# Altium PCB CCS_v3.2.PcbDoc
Units mil, origin at the board's own origin, x right, y up, seen from the top; angles counter-clockwise.
Board outline 2195 x 2996 mil, 2 copper layers (Top Layer, Bottom Layer); 37 components, 44 nets, 265 pads, 35 vias.
Unrouted connection lines stored in the file: 1.
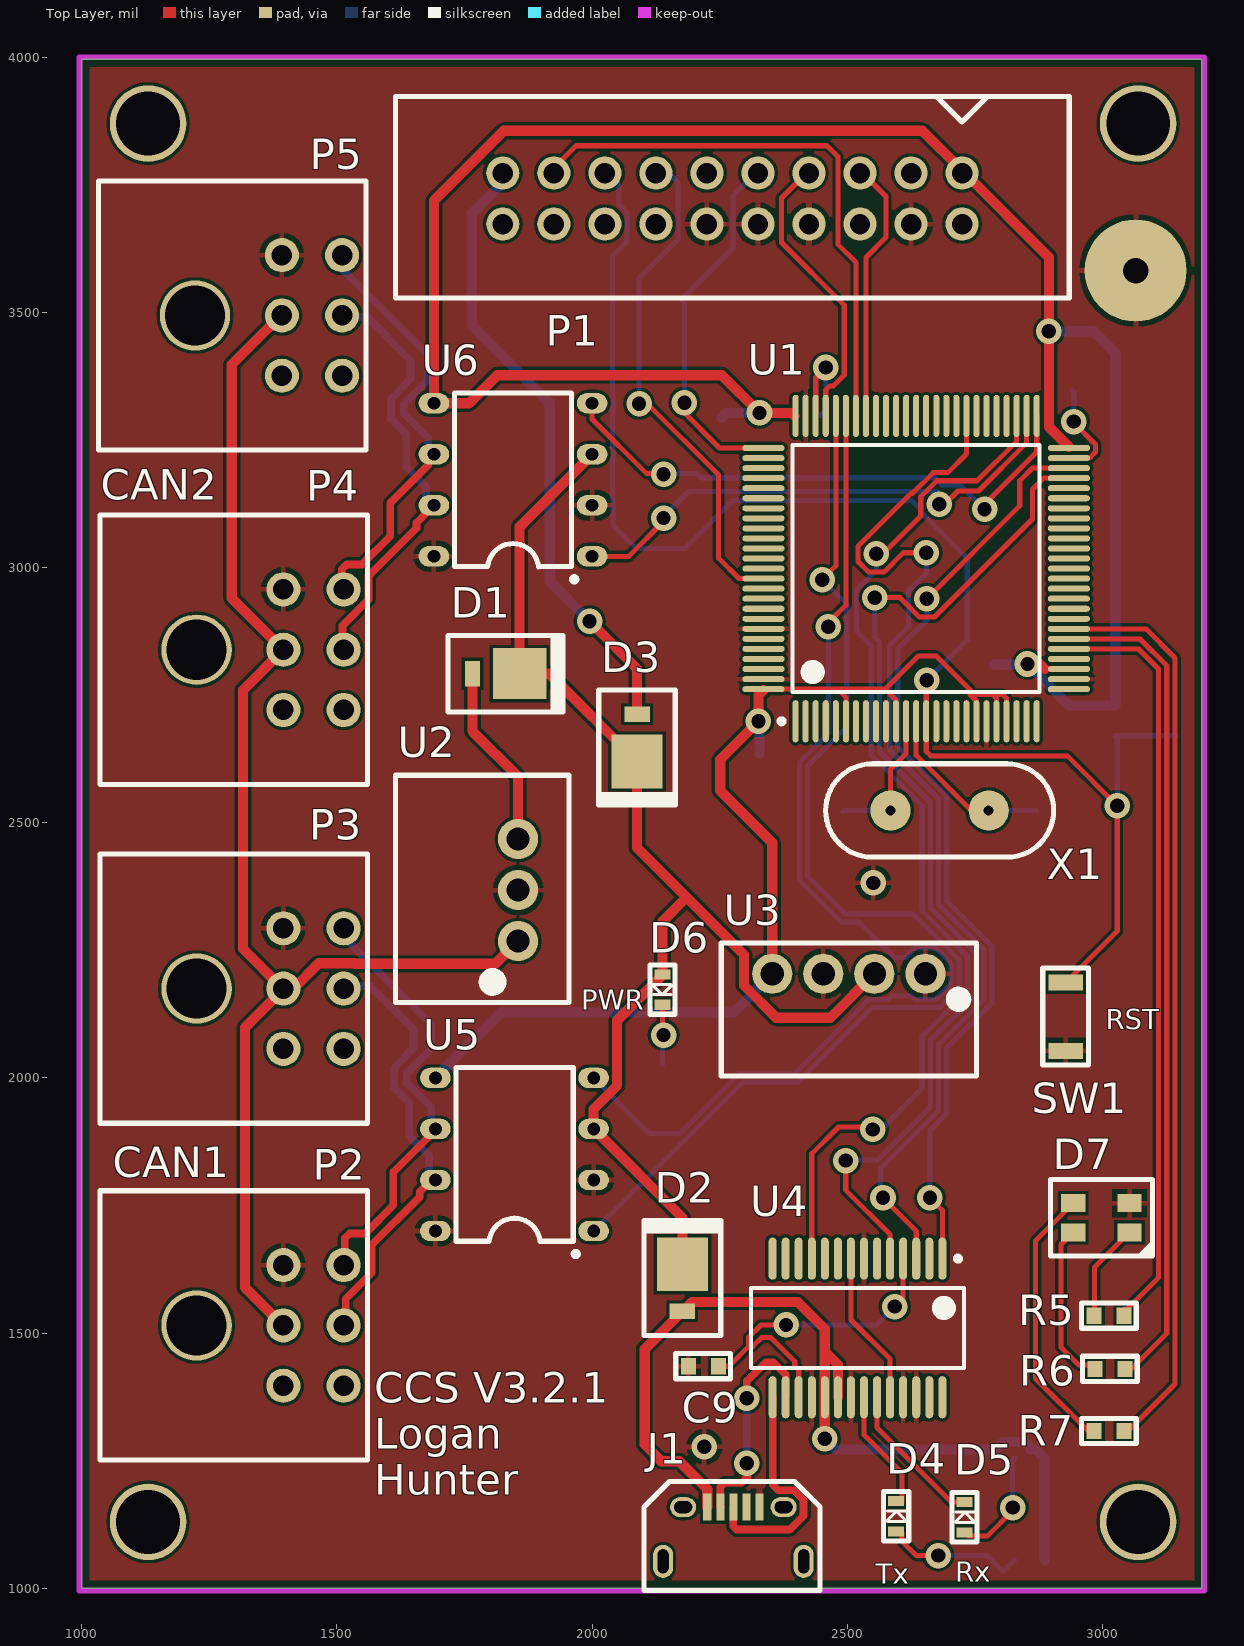
[diagram p0: Top Layer view]
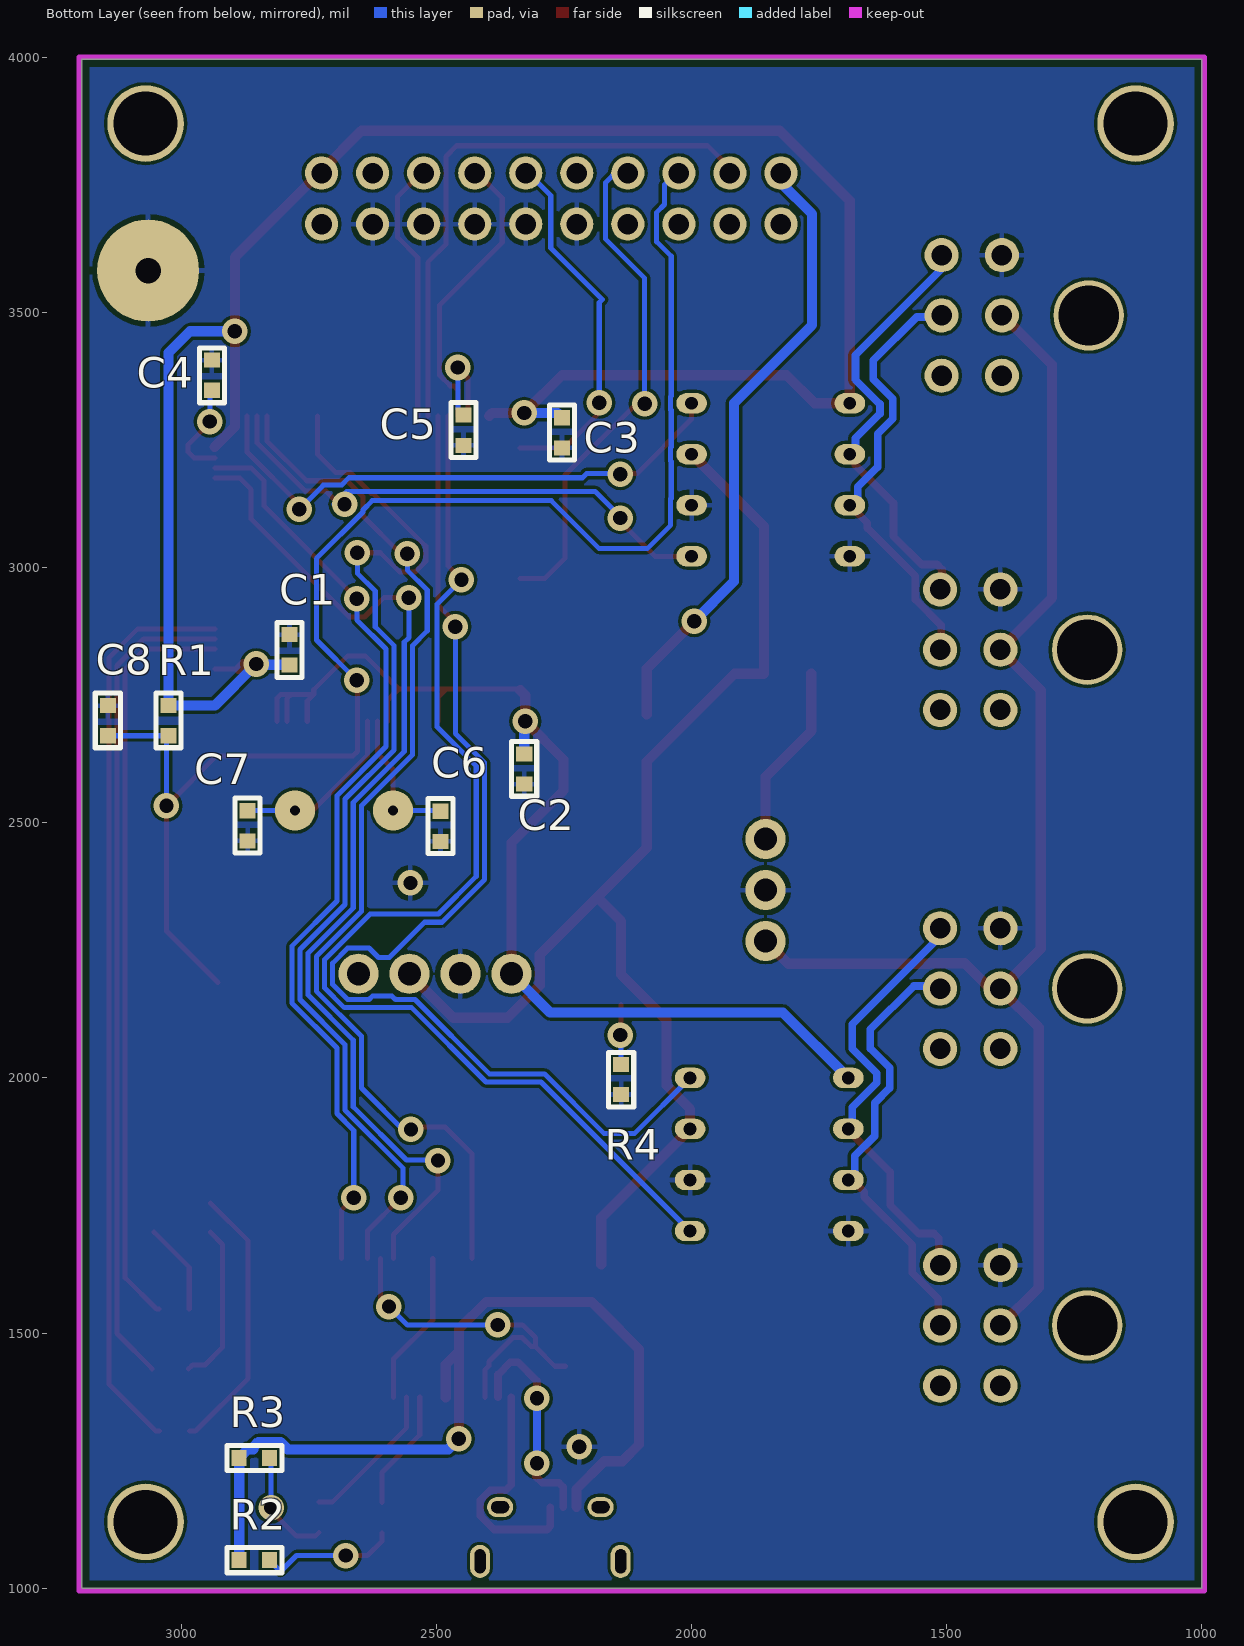
[diagram p1: Bottom Layer view, seen from below]

## Layer stack, top to bottom
Top Solder: solder mask 0.4, Solder Resist, Dk 3.5
Top Layer: signal copper 1.4
Dielectric 1: dielectric 12.6, FR-4, Dk 4.8
Bottom Layer: signal copper 1.4
Bottom Solder: solder mask 0.4, Solder Resist, Dk 3.5

## Board outline
1000,1000 3195,1000 3195,3996 1000,3996

## Design rules (kind name [scope] priority, off if disabled: settings)
BoardOutlineClearance [All] p1: gap=15
Clearance [All] p1: gap=6
DiffPairsRouting [All] p1: maxlimit=10 minlimit=10 mostfreqgap=10 toplayer_minwidth=15 toplayer_maxwidth=15 toplayer_prefwidth=15 bottomlayer_minwidth=15 bottomlayer_maxwidth=15 bottomlayer_prefwidth=15 maxuncoupledlength=500
HoleSize [All] p1: absolutevalues=TRUE maxlimit=100 minlimit=13 maxpercent=80.000 minpercent=20.000
MinimumAnnularRing [All] p1: minimumring=7
PolygonConnect [All] p1: connectstyle=Relief reliefconductorwidth=10 reliefentries=4 polygonreliefangle="90 Angle" airgapwidth=10
RoutingVias [All] p1: holewidth=28 width=50 viastyle="Through Hole" minholewidth=28 minwidth=50 maxholewidth=28 maxwidth=50
SolderMaskExpansion [All] p1: expansion=4
Width [All] p1: maxlimit=30 minlimit=6 preferedwidth=10
28 further rules are at their usual default settings.

## Classes and differential pairs
component class Conectors: J1 P1 P2 P3 P4 P5
component class Power: C1 C2 C3 D1 D2 D3 D6 R4 U2 U3
component class MCU: C4 C5 C6 C7 C8 D7 R1 R5 R6 R7 SW1 U1 X1
component class Communications: C9 D4 D5 R2 R3 U4 U5 U6
differential pair USBD: +USBD_P -USBD_N
differential pair CAN2: +CAN2_P -CAN2_N
differential pair CAN1: +CAN1_P -CAN1_N

## Components (designator, comment, footprint, x,y, rotation, side; value= is the part's Value field where it differs from the comment)
C1 "SCH_GENERIC_CAPACITOR_0603" PCB_GENERIC_SMD_0603 2788,2839 r270 bottom
C2 "SCH_GENERIC_CAPACITOR_0603" PCB_GENERIC_SMD_0603 2328,2605 r90 bottom
C3 "SCH_GENERIC_CAPACITOR_0603" PCB_GENERIC_SMD_0603 2254,3264 r90 bottom
C4 "SCH_GENERIC_CAPACITOR_0603" PCB_GENERIC_SMD_0603 2940,3377 r270 bottom
C5 "SCH_GENERIC_CAPACITOR_0603" PCB_GENERIC_SMD_0603 2447,3269 r90 bottom
C6 "SCH_GENERIC_CAPACITOR_0603" PCB_GENERIC_SMD_0603 2492,2493 r90 bottom
C7 "SCH_GENERIC_CAPACITOR_0603" PCB_GENERIC_SMD_0603 2870,2494 r90 bottom
C8 "SCH_GENERIC_CAPACITOR_0603" PCB_GENERIC_SMD_0603 3144,2700 r90 bottom
C9 "SCH_GENERIC_CAPACITOR_0603" PCB_GENERIC_SMD_0603 2218,1435 r180 top
D1 "Schottky Diode" "ON Semi Schottky Diode - MBRM110LT1G" 1793,2792 r180 top
D2 "Schottky Diode" "ON Semi Schottky Diode - MBRM110LT1G" 2177,1570 r270 top
D3 "Schottky Diode" "ON Semi Schottky Diode - MBRM110LT1G" 2088,2685 r90 top
D4 "Green LED" SMD_0603_LED 2594,1141 r90 top
D5 "Orange LED" SMD_0603_LED 2728,1139 r90 top
D6 "Red LED" SMD_0603_LED 2140,2173 r270 top
D7 "TriColourLED" "TricolourLED - SunLED - DK  1497-1225-2-ND" 2998,1726 r0 top
J1 "Amphenol MicroUSB" "Amphenol MicroUSB" 2276.82,1159 r0 top
P1 "SWD/VCOM Header" "Samtec TST-110-01-G-D" 1825,3773 r0 top
P2 "CAN1" PCB_MLX_MICROFIT_3X2 1225,1515 r270 top
P3 "CAN1 TERM" PCB_MLX_MICROFIT_3X2 1225,2175 r270 top
P4 "CAN2" PCB_MLX_MICROFIT_3X2 1225,2839 r270 top
P5 "CAN2 TERM" PCB_MLX_MICROFIT_3X2 1222,3494 r270 top
R1 "SCH_GENERIC_RESISTOR_0603" PCB_GENERIC_SMD_0603 3025,2700 r90 bottom
R2 "SCH_GENERIC_RESISTOR_0603" PCB_GENERIC_SMD_0603 2856.98,1055 r180 bottom
R3 "SCH_GENERIC_RESISTOR_0603" PCB_GENERIC_SMD_0603 2856.98,1255 r180 bottom
R4 "SCH_GENERIC_RESISTOR_0603" PCB_GENERIC_SMD_0603 2138,1997 r270 bottom
R5 "SCH_GENERIC_RESISTOR_0603" PCB_GENERIC_SMD_0603 3013,1534 r180 top
R6 "SCH_GENERIC_RESISTOR_0603" PCB_GENERIC_SMD_0603 3015,1430 r180 top
R7 "SCH_GENERIC_RESISTOR_0603" PCB_GENERIC_SMD_0603 3013,1308 r180 top
SW1 "Reset Switch" "Push Button Switch" 2928,2120 r270 top
U1 "STM32F407VGT6" STM-LQFP100_M 2635,2998 r90 top
U2 "R78E-1.0 DC/DC" R78-1.0 1855,2368 r90 top
U3 "RECOM RO Series" "RECOM RO Series 1W DCDC" 2653,2204 r180 top
U4 "IC_FT232RL" SSOP-28 2520,1510 r270 top
U5 "MCP2562" MCP2562 1848,1850 r180 top
U6 "MCP2562" MCP2562 1845,3172 r180 top
X1 "XTAL" CRYSTAL_8MHZ 2681,2524 r0 top

## Footprints (in the part's own frame and the unit in brackets; to place one, negate y for a bottom-side part, rotate by r counter-clockwise, add the part's x,y. Pads: shape width x height; smd on the part's side, far side on the other; paste and mask are expansions set on the pad)
"Amphenol MicroUSB" [mm] "10118194-0001LF"
  rect 0.4x1.35 smd: 1(-1.3,0) 2(-0.65,0) 3(0,0) 4(0.65,0) 5(1.3,0)
  oval 1x1.65 hole 0.55 slot 1.2 at 90 deg: ""(-3.5,-2.7) ""(3.5,-2.7)
  oval 1.3x1 hole 0.6 slot 0.9 at 0 deg: ""(-2.5,0) ""(2.5,0)
  silkscreen extent -4.44,-4.15 4.32,1.27, body extent -4.06,-5.21 4.06,0.51, height 2.4
CRYSTAL_8MHZ [mm] "631-1100-ND"
  round 2 hole 0.5: 1(-2.44,0) 2(2.44,0)
  silkscreen extent -5.68,-2.32 5.68,2.32, body extent -5.59,-1.85 5.59,1.85, height 3.6
MCP2562 [mil]
  oval 60x40 hole 25: 1(-155,150) 2(-155,50) 3(-155,-50) 4(-155,-150) 5(155,-150) 6(155,-50) 7(155,50) 8(155,150)
  silkscreen extent -125,-170 115,200, body extent -115,-170 115,170, height 210
"ON Semi Schottky Diode - MBRM110LT1G" [mil]
  rect 105x100 smd: 1(-65,0)
  rect 30x50 smd: 2(27.5,0)
  silkscreen extent -150,-75 75,75, body extent -115,-65 0,65, height 40
PCB_GENERIC_SMD_0603 [mm]
  rect 0.75x0.8 smd: 1(-0.75,0) 2(0.75,0)
  silkscreen extent -1.35,-0.63 1.38,0.63, body extent -0.75,-0.5 0.75,0.5, height 0.45
PCB_MLX_MICROFIT_3X2 [mm]
  round 1.7 hole 1.02: 1(3,4.32) 2(0,4.32) 3(-3,4.32) 4(3,7.32) 5(0,7.32) 6(-3,7.32)
  round 3.5 hole 3: ""(0,0)
  silkscreen extent -6.7,-4.8 6.7,8.5, body extent -6.57,-4.65 6.58,7.59, height 8.83
"Push Button Switch" [mm]
  rect 0.8x1.7 smd: 1(-1.7,0) 2(1.7,0)
  silkscreen extent -2.41,-1.14 2.41,1.14, body extent -2.16,-0.89 2.16,0.89, height 1.6
R78-1.0 [mm]
  round 2 hole 1.15: 1(-2.54,0) 2(0,0) 3(2.54,0)
  silkscreen extent -5.59,-2.54 5.71,6.1, body extent -4.44,-1.59 4.45,5.4, height 10.4
"RECOM RO Series 1W DCDC" [mm] "RO-053.3S"
  round 2 hole 1.15: 1(0,0) 2(2.54,0) 3(5.08,0) 4(7.62,0)
  silkscreen extent -2.54,-1.52 10.16,5.08, body extent -2.41,-1.4 10.03,4.95, height 10
"Samtec TST-110-01-G-D" [mil] "TST-110-01-G-D"
  round 65 hole 40: 1(900,0) 2(900,-100) 3(800,0) 4(800,-100) 5(700,0) 6(700,-100) 7(600,0) 8(600,-100) 9(500,0) 10(500,-100) 11(400,0) 12(400,-100) 13(300,0) 14(300,-100) 15(200,0) 16(200,-100) 17(100,0) 18(100,-100) 19(0,0) 20(0,-100)
  silkscreen extent -210,-245 1110,150, body extent -200,-233 1100,132, height 350
SMD_0603_LED [mm]
  rect 0.5x0.8 smd: 1(-0.747,-0.047) 2(0.753,-0.047)
  silkscreen extent -1.22,-0.67 1.23,0.58, body extent -0.75,-0.55 0.75,0.45, height 0.45
SSOP-28 [mm] "28-Pin SSOP 0.65 mm Pitch"
  oval 2.1x0.4 smd: 1(-3.45,4.225) 2(-3.45,3.575) 3(-3.45,2.925) 4(-3.45,2.275) 5(-3.45,1.625) 6(-3.45,0.975) 7(-3.45,0.325) 8(-3.45,-0.325) 9(-3.45,-0.975) 10(-3.45,-1.625) 11(-3.45,-2.275) 12(-3.45,-2.925) 13(-3.45,-3.575) 14(-3.45,-4.225) 15(3.45,-4.225) 16(3.45,-3.575) 17(3.45,-2.925) 18(3.45,-2.275) 19(3.45,-1.625) 20(3.45,-0.975) 21(3.45,-0.325) 22(3.45,0.325) 23(3.45,0.975) 24(3.45,1.625) 25(3.45,2.275) 26(3.45,2.925) 27(3.45,3.575) 28(3.45,4.225)
  silkscreen extent -3.57,-5.3 2,5.3, body extent -2.7,-5.3 2.7,5.3, height 2
STM-LQFP100_M [mm] "Thin QFP, 100-Leads, Body 14x14mm, Pitch 0.5mm, IPC Low Density"
  oval 2.1x0.3 smd: 1(-7.6,6) 2(-7.6,5.5) 3(-7.6,5) 4(-7.6,4.5) 5(-7.6,4) 6(-7.6,3.5) 7(-7.6,3) 8(-7.6,2.5) 9(-7.6,2) 10(-7.6,1.5) 11(-7.6,1) 12(-7.6,0.5) 13(-7.6,0) 14(-7.6,-0.5) 15(-7.6,-1) 16(-7.6,-1.5) 17(-7.6,-2) 18(-7.6,-2.5) 19(-7.6,-3) 20(-7.6,-3.5) 21(-7.6,-4) 22(-7.6,-4.5) 23(-7.6,-5) 24(-7.6,-5.5) 25(-7.6,-6) 51(7.6,-6) 52(7.6,-5.5) 53(7.6,-5) 54(7.6,-4.5) 55(7.6,-4) 56(7.6,-3.5) 57(7.6,-3) 58(7.6,-2.5) 59(7.6,-2) 60(7.6,-1.5) 61(7.6,-1) 62(7.6,-0.5) 63(7.6,0) 64(7.6,0.5) 65(7.6,1) 66(7.6,1.5) 67(7.6,2) 68(7.6,2.5) 69(7.6,3) 70(7.6,3.5) 71(7.6,4) 72(7.6,4.5) 73(7.6,5) 74(7.6,5.5) 75(7.6,6)
  oval 0.3x2.1 smd: 26(-6,-7.6) 27(-5.5,-7.6) 28(-5,-7.6) 29(-4.5,-7.6) 30(-4,-7.6) 31(-3.5,-7.6) 32(-3,-7.6) 33(-2.5,-7.6) 34(-2,-7.6) 35(-1.5,-7.6) 36(-1,-7.6) 37(-0.5,-7.6) 38(0,-7.6) 39(0.5,-7.6) 40(1,-7.6) 41(1.5,-7.6) 42(2,-7.6) 43(2.5,-7.6) 44(3,-7.6) 45(3.5,-7.6) 46(4,-7.6) 47(4.5,-7.6) 48(5,-7.6) 49(5.5,-7.6) 50(6,-7.6) 76(6,7.6) 77(5.5,7.6) 78(5,7.6) 79(4.5,7.6) 80(4,7.6) 81(3.5,7.6) 82(3,7.6) 83(2.5,7.6) 84(2,7.6) 85(1.5,7.6) 86(1,7.6) 87(0.5,7.6) 88(0,7.6) 89(-0.5,7.6) 90(-1,7.6) 91(-1.5,7.6) 92(-2,7.6) 93(-2.5,7.6) 94(-3,7.6) 95(-3.5,7.6) 96(-4,7.6) 97(-4.5,7.6) 98(-5,7.6) 99(-5.5,7.6) 100(-6,7.6)
  silkscreen extent -7.72,-6.15 6.15,6.82, body extent -7,-7 7,7, height 1.6
"TricolourLED - SunLED - DK  1497-1225-2-ND" [mm]
  rect 1.2x0.9 smd: 1(1.4,-0.725) 2(-1.4,-0.725) 3(-1.4,0.725) 4(1.4,0.725)
  silkscreen extent -2.54,-1.91 2.54,1.91, body extent -1.84,-1.52 1.84,1.52, height 1.9

## Part data
C1 C2 C3 C4 C5 C6 C7 C8 C9: "Generic SMD capacitor 0603"
D1 D2 D3: library part "ON Semi Schottky Diode - MBRM110LT1G"
D4 D5 D6: library part SMD_0603_LED
J1: library part "Amphenol MicroUSB - 609-4618-1-ND"
P2 P3 P4 P5: library part SCH_MLX_MICROFIT_3X2
R1 R2 R3 R4 R5 R6 R7: "Generic SMD resistor 0603"
SW1: library part PushButtonSwitch
U1: "ARM Cortex-M4 32-bit MCU+FPU, 210 DMIPS, 1024 kB Flash, 192 kB Internal RAM, 82 I/Os, 100-pin LQFP, -40 to 85 degC, Tray"
U2: library part R78E-1.0
U3: library part "RECOM RO Series DCDC Converter"
U4: "FT232R USB UART"
X1: library part Crystal

## Free pads (board coordinates)
  round 150 hole 125: ""(1130,1130) ""(1130,3870) ""(3070,1130) ""(3070,3870)
  round 200 hole 50: ""(3065,3582)

## Via types
v1: diameter 50, hole 28, Top Layer to Bottom Layer, 35 vias

## Nets (pads, with @x,y where several pads share a name; then routed paths per layer and width w, separated by ;. In a path a pad name is that pad's centre, name@x,y a point inside that pad or via, vN(x,y) a via of type N, cw(c..) or ccw(c..) an arc to the next point about the centre after c; other vN are vias at no path point)
3.3V: C1.2 C2.2 C3.2 P1.1 R1.2 U1.6 U1.11 U1.19 U1.21 U1.22 U1.28 U1.50 U1.75 U1.100 U3.4 U5.5 U6.5 | length 6470.7
  Top Layer w10: U1.100 2481.22,2761.78 ; U1.6 2497.2,2745.8 2481.22,2761.78 ; U1.11 2595.63,2740.37 2574.22,2761.78 ; U1.19 2753.11,2738.44 2740.43,2751.13 ; U1.21 2792.48,2743.77 2785.13,2751.13 ; U1.22 2812.17,2743.83 2804.87,2751.13 2785.13,2751.13 ; 2887.49,2801.15 U1.28 ; 2481.22,2761.78 2574.22,2761.78 ; 2574.22,2761.78 2639.44,2827 2674,2827 2740.43,2760.57 2740.43,2751.13 ; 2740.43,2751.13 2785.13,2751.13
  Top Layer w20: U1.100@2335.79,2759.56 2326,2749.77 v1(2326,2699) 2251,2624 2251,2563 2353,2461 U3.4 ; U1.75@2396.56,3297.21 2390.77,3303 v1(2328,3303) 2254,3377 1814,3377 1759,3322 U6.5 1690,3719 1827,3856 2647,3856 2725,3778 2895,3608 v1(2895,3463) 2895,3275.65 U1.50@2934.21,3236.44 ; v1(2853,2811) 2877.64,2811 2887.49,2801.15
  Bottom Layer w20: U5.5 1821,2128 2277,2128 U3.4 ; C3.2 2263.47,3303 v1(2328,3303) ; v1(2326,2699) 2328,2697 C2.2 ; C1.2 2851.47,2809.47 v1(2853,2811) 2934.47,2729.53 R1.2 3025,3421 2983,3463 v1(2895,3463)
5V: D1.1 D2.1 D3.1 D6.1 U3.2 U5.3 U6.3 | length 2499.4
  Top Layer w20: U6.3 1858,3080 D1.1 1916,2792 D3.1 2088,2451 2185,2354 ; D2.1 2177,1726 U5.3 2003,1939.09 2049,1985.09 2049,2113.26 D6.1 2138.15,2307.15 2185,2354 ; U3.2 2467,2118 2360.69,2118 2297.63,2181.07 2297.63,2241.37 2185,2354
"5V - DCDC": D1.2 U2.3 | length 361.1
  Top Layer w20: D1.2 1765.5,2679.5 1855,2590 U2.3
"5V - DEBUG": D3.2 P1.19 | length 1225
  Top Layer w20: v1(1995,2895) 2088,2802 D3.2
  Bottom Layer w20: P1.19@1825,3778 1825,3754 1764,3693 1764,3475 1917,3322 1917,2973 v1(1995,2895)
"5V - USB": D2.2 J1.1 R2.1 R3.1 U4.19 U4.20 | length 1771.3
  Top Layer w20: J1.1 2225.64,1194.36 2171,1249 2135.64,1249 2103,1281.64 2103,1468.5 D2.2 2195.5,1561 2403,1561 2456.02,1507.98 U4.19 v1(2456.02,1293.02) ; 2456.02,1463.98 2481.61,1438.39 U4.20
  Bottom Layer w20: v1(2456.02,1293.02) 2477.05,1272 2791.32,1272 2806.07,1286.75 2848.85,1286.75 2858.22,1277.38 2858.22,1272 2869.51,1272 R3.1 R2.1
12V: P2.2 P3.2 P4.2 P5.2 U2.1 | length 2689.1
  Top Layer w20: P5.2@1390.08,3494 1294,3397.92 1294,2940.08 P4.2 1316,2759.92 1316,2253.08 P3.2@1395.08,2174 ; P2.2@1395.08,1514 1320,1589.08 1320,2098.92 P3.2@1395.08,2174 ; U2.1 1810.46,2223.46 1534.68,2223.46 1533.68,2224.46 1464.46,2224.46 1414,2174 P3.2@1395.08,2174
BLUE_LED: R7.1 U1.32 | length 1791.9
  Top Layer w10: U1.32 3085.11,2879.89 3142,2823 3142,1400 3050,1308 R7.1
CAN1_N: P2.6 P3.6 U5.6 | length 857.3
  Top Layer w15: P2.6@1518.19,1643.11 1515.5,1645.8 1515.5,1685.5 1525,1695 1555,1695 1610.5,1750.5 1610.5,1815.5 1685,1890 U5.6@1685,1900
  Bottom Layer w15: P3.6@1508.11,2298.11 1508.69,2298.11 1508.69,2281.31 1685,2105 1685,2057.38 1637,2009.38 1637,1990.62 1685,1942.62 U5.6@1685,1900
CAN1_P: P2.5 P3.5 U5.7 | length 856.2
  Top Layer w15: P2.5@1518.19,1525 1517,1526.19 1517,1567 1568,1618 1568,1672.64 1662,1766.64 1662,1777 U5.7@1685,1800
  Bottom Layer w15: P3.5@1513.19,2180 1565,2180 1650,2095 1650,2057.73 1612,2019.73 1612,1980.27 1641.5,1950.77 1641.5,1886.12 1680.5,1847.12 U5.7@1680.5,1800
CAN1_RX: U1.70 U5.4 | length 2223.1
  Top Layer w10: v1@2470,2899 2497.2,2926.2 U1.70
  Bottom Layer w10: U5.4 2112.23,1890.77 2171.15,1890.77 2288.37,2008 2396.37,2008 2542,2153.63 2580.37,2153.63 2586.88,2160.14 2625.63,2160.14 2632.14,2153.63 2673.86,2153.63 2703.37,2183.14 2703.37,2224.86 2673.86,2254.37 2632.14,2254.37 2613.51,2235.75 2592.49,2235.75 2523.23,2305 2489.37,2305 2406,2388.37 2406,2617.63 2463,2674.63 v1(2463,2884)
CAN1_TX: U1.71 U5.1 | length 2285.8
  Top Layer w10: v1@2459.5,2985.5 2477.52,3003.52 U1.71
  Bottom Layer w10: U5.1 2295,1992 2403,1992 2548.63,2137.63 2680.49,2137.63 2719.37,2176.51 2719.37,2231.49 2629.86,2321 2496,2321 2422,2395 2422,2611 2499,2688 2499,2928 v1(2451,2976)
CAN2_N: P4.6 P5.6 U6.6 | length 857.3
  Top Layer w15: P4.6@1512.19,2954.11 1509.5,2956.8 1509.5,2996.5 1519,3006 1549,3006 1604.5,3061.5 1604.5,3126.5 1679,3201 U6.6@1679,3211
  Bottom Layer w15: P5.6@1502.11,3609.11 1502.69,3609.11 1502.69,3592.31 1679,3416 1679,3368.38 1631,3320.38 1631,3301.62 1679,3253.62 U6.6@1679,3211
CAN2_P: P4.5 P5.5 U6.7 | length 856.2
  Top Layer w15: P4.5@1512.19,2836 1511,2837.19 1511,2886.5 1562,2937.5 1562,2983.64 1656,3077.64 1656,3088 U6.7@1679,3111
  Bottom Layer w15: P5.5@1507.19,3491 1559,3491 1644,3406 1644,3368.73 1606,3330.73 1606,3291.27 1635.5,3261.77 1635.5,3197.12 1674.5,3158.12 U6.7@1674.5,3111
CAN2_RX: U1.51 U6.4 | length 1111.9
  Top Layer w10: U6.4 2000,3291 2107,3184 2139,3184 v1(2140,3183) ; v1(2769,3114) 2769,3124 2871.22,3226.22 U1.51
  Bottom Layer w10: v1@2130,3189 2135,3184 2206,3184 2214,3176 2671.63,3176 2685.63,3162 2722,3162 2722,3161 v1(2769,3114)
CAN2_TX: U1.52 U6.1 | length 1065
  Top Layer w10: U6.1 2072,3022 2140,3090 v1(2140,3097) ; v1(2680,3124) 2691,3124 2717,3150 2757,3150 2851.54,3244.54 U1.52
  Bottom Layer w10: v1(2140,3097) 2140,3100 2189,3149 2676,3149 2701,3124 v1(2680,3124)
GND: C1.1 C2.1 C3.1 C4.1 C5.1 C6.1 C7.1 C8.2 C9.2 D7.4 J1.5 P1.4 P1.6 P1.8 P1.10 P1.12 P2.3 P3.3 P4.3 P5.3 pad.@3065,3582 R4.2 SW1.2 U1.10 U1.20 U1.27 U1.74 U1.94 U1.99 U2.2 U3.1 U3.3 U4.7 U4.18 U4.21 U4.25 U4.26 U5.2 U5.8 U6.2 U6.8
  other v1: 2220,1277 2551,2382
GREEN_LED: R6.1 U1.31 | length 1620
  Top Layer w10: U1.31 3073.8,2860.2 3126,2808 3126,1499 R6.1@3057,1430
NC: U4.8 U4.24 | length 303.5
  Top Layer w10: U4.8 2507.2,1525.8 2583.98,1449.02 U4.24
NetC4_2: C4.2 U1.49 | length 194.2
  Top Layer w10: U1.49 U1.49@2974.64,3214.54 ; v1(2944,3286) 2944,3283.77 2986.55,3241.22 2986.55,3226.45 2977,3216.9
  Bottom Layer w10: C4.2 2944,3343.47 v1(2944,3286)
NetC5_2: C5.2 U1.73 | length 201
  Top Layer w10: U1.73 2438.15,3372.15 v1(2458,3392)
  Bottom Layer w10: C5.2 2458,3309.53 v1(2458,3392)
NetC7_2: C7.2 U1.13 X1.2 | length 346.7
  Top Layer w10: U1.13 2635,2632 2743,2524 X1.2
  Bottom Layer w10: X1.2 2869.53,2524 C7.2
NetC9_1: C9.1 U4.4 U4.17 | length 698.1
  Top Layer w10: C9.1 2268,1435 2308,1475 ; v1(2380,1516) 2331,1516 2306.16,1491.16 2306.16,1474 2314.84,1474 2332.34,1491.5 2350.02,1491.5 2397.16,1444.36 2397.16,1435.84 2404.84,1428.16 U4.17 ; v1(2593,1552) 2609.57,1568.57 U4.4
  Bottom Layer w10: v1(2380,1516) 2557,1516 v1(2593,1552)
NetD4_1: D4.1 R2.2 | length 270.7
  Top Layer w10: D4.1@2606.85,1108.59 2606.85,1092.15 2635,1064 v1(2678,1064)
  Bottom Layer w10: v1(2678,1064) 2774.46,1064 2805.46,1033 R2.2
NetD4_2: D4.2 U4.22 | length 237.2
  Top Layer w10: U4.22 2532.8,1300.8 2606.85,1226.74 D4.2@2606.85,1167.65
NetD5_1: D5.1 R3.2 | length 236.6
  Top Layer w10: D5.1 2737.44,1102 2774.26,1102 2824,1151.74 v1(2824,1158) v1@2824,1172
  Bottom Layer w10: v1(2824,1158) 2824,1251.54 R3.2
NetD5_2: D5.2 U4.23 | length 291.5
  Top Layer w10: U4.23 2558.39,1314.61 2704.35,1168.65 D5.2
NetD6_2: D6.2 R4.1 | length 118.4
  Top Layer w10: D6.2 2138.15,2085.85 v1(2140,2084)
  Bottom Layer w10: R4.1 2138,2082 v1(2140,2084)
NetD7_1: D7.1 R5.2 | length 178.9
  Top Layer w10: R5.2@2984.47,1547 2984.47,1628.81 D7.1
NetD7_2: D7.2 R6.2 | length 319.2
  Top Layer w10: D7.2 2919,1673.57 2919,1472 2953.74,1437.26 2978.21,1437.26 R6.2
NetD7_3: D7.3 R7.2 | length 531.3
  Top Layer w10: D7.3 2869,1680.66 2869,1411 2972,1308 R7.2
NRST: C8.1 P1.15 R1.1 SW1.1 U1.14 | length 3004.2
  Top Layer w10: v1(2656,2779) 2654.68,2777.68 U1.14 2654.68,2639.68 2663.37,2631 2931,2631 v1(3029,2533) 3029,2287.93 SW1.1
  Bottom Layer w10: P1.15@2025,3778 2053,3750 2053,3711.52 2068.5,3696.02 2068.5,3638.5 2040,3610 2040,3335.84 2041,3334.84 2041,3309.16 2040,3308.16 2040,3235.84 2041,3234.84 2041,3209.16 2040,3208.16 2040,3135.84 2041,3134.84 2041,3083 2087,3037 2181.12,3037 2275.12,3131 2626,3131 2644,3113 2644,3109.09 2735,3018.09 2735,2858 v1(2656,2779) ; v1(3029,2533) 3029,2666.47 R1.1 C8.1
RED_LED: R5.1 U1.30 | length 1477
  Top Layer w10: U1.30 3070.85,2840.52 3110,2801.37 3110,1608.25 3048.75,1547 R5.1@3043.53,1547
SCLK: C6.2 U1.12 X1.1 | length 280.9
  Top Layer w10: X1.1 2584.94,2604.94 2615.32,2635.32 U1.12
  Bottom Layer w10: C6.2 2493.47,2524 X1.1
SWCLK: P1.9 U1.76 | length 727.9
  Top Layer w10: v1(2181,3323) 2181,3315 2175,3309 2249.78,3234.22 U1.76
  Bottom Layer w10: v1(2181,3323) 2181,3519 2175,3525 2276,3626 2276,3729 P1.9@2325,3778
SWDIO: P1.7 U1.72 | length 573.3
  Top Layer w10: P1.7@2425,3778 2371,3724 2371,3637 2494,3514 2494,3377.09 2472.91,3356 2465.77,3356 2457.83,3348.07 U1.72
SWO: P1.13 U1.89 | length 999.7
  Top Layer w10: v1(2092,3321) 2108.12,3321 2248,3181.12 2248,3018 2287.68,2978.32 U1.89
  Bottom Layer w10: v1(2092,3321) 2092,3567 2168.5,3643.5 2168.5,3754.5 2145,3778 P1.13@2125,3778
UART1_RX: P1.17 U1.69 | length 1111.2
  Top Layer w10: P1.17@1925,3778 1925,3783 1968.5,3826.5 2460.5,3826.5 2481.5,3805.5 2481.5,3633.5 2516.89,3598.11 U1.69
UART1_TX: P1.5 U1.68 | length 518.2
  Top Layer w10: P1.5@2525,3778 2576,3727 2576,3647 2536.57,3607.57 U1.68
UART3_CTS: U1.58 U4.3 | length 2152.5
  Top Layer w10: v1(2570,1765) 2635.16,1699.84 U4.3 ; v1(2655,3029) 2609.91,3029 2571.91,2991 2542.09,2991 2521,3012.09 2521,3041.91 2624.63,3145.54 2628,3145.54 2668.46,3186 2697,3186 2733.43,3222.43 U1.58
  Bottom Layer w10: v1(2570,1765) 2565.25,1769.75 2565.25,1823 2679,1936.75 2679,2065 2767.37,2153.37 2767.37,2251.37 2679,2339.74 2679,2546.43 2582.81,2642.61 2582.81,2846.81 2620,2884 2620,2953.91 2655,2988.91 v1(2655,3029)
UART3_RTS: U1.53 U4.11 | length 2114.1
  Top Layer w10: U4.11 2430.43,1851.43 2483,1904 2545,1904 v1(2550,1899) ; v1(2557,3027) 2570,3027 2644,3101 2644,3138.91 2675.09,3170 2754.37,3170 2831.85,3247.48 U1.53
  Bottom Layer w10: v1(2550,1899) 2558,1891 2647,1980 2647,2081.51 2735.37,2169.88 2735.37,2238.12 2647,2326.49 2647,2533.17 2547,2633.17 2547,2847 2518,2876 2518,2955.91 2557,2994.91 v1(2557,3027)
UART3_RX: U1.48 U4.1 | length 1866.6
  Top Layer w10: v1(2656,2939) 2838,3121 2838,3170.01 2862.84,3194.85 U1.48 ; v1(2662,1765) 2686.34,1740.66 U4.1
  Bottom Layer w10: v1(2656,2939) 2656,2897.37 2598.81,2840.19 2598.81,2649.24 2695,2553.05 2695,2346.37 2783.37,2258 2783.37,2146.74 2695,2058.37 2695,1930.12 2662,1897.12 v1(2662,1765)
UART3_TX: U1.47 U4.5 | length 2096.4
  Top Layer w10: v1(2497,1838) 2497,1780 2583.98,1693.02 U4.5 ; v1(2554,2941) 2603.09,2941 2641.09,2903 2670.91,2903 2863,3095.09 2863,3153 2885.17,3175.17 U1.47
  Bottom Layer w10: v1(2497,1838) 2498,1839 2558.63,1839 2663,1943.37 2663,2074 2751.37,2162.37 2751.37,2244.75 2663,2333.12 2663,2539.8 2563,2639.8 2563,2853.63 2554,2862.63 v1(2554,2941)
USBD_N: J1.2 U4.16 | length 436.5
  Top Layer w15: J1.2@2251.82,1159.59 J1.2 2251.23,1198.23 2260,1207 2293,1207 2305,1219 2305,1243 v1(2303,1245) ; v1(2303,1372) 2303,1406 2340,1443 2355,1443 2379.25,1418.75 U4.16
  Bottom Layer w15: v1(2303,1245) v1(2303,1372)
USBD_P: J1.3 U4.15 | length 465.2
  Top Layer w15: J1.3 2276.82,1121.18 2283,1115 2387,1115 2414.33,1142.33 2412.87,1143.79 2414.33,1145.25 2414.33,1172.75 2394.9,1192.18 2364.48,1192.18 2353.66,1203.01 U4.15
pads on no net: J1. J1.4 P1.2 P1.3 P1.11 P1.14 P1.16 P1.18 P1.20 P2. P2.1 P2.4 P3. P3.1 P3.4 P4. P4.1 P4.4 P5. P5.1 P5.4 U1.1 U1.2 U1.3 U1.4 U1.5 U1.7 U1.8 U1.9 U1.15 U1.16 U1.17 U1.18 U1.23 U1.24 U1.25 U1.26 U1.29 U1.33 U1.34 U1.35 U1.36 U1.37 U1.38 U1.39 U1.40 U1.41 U1.42 U1.43 U1.44 U1.45 U1.46 U1.54 U1.55 U1.56 U1.57 U1.59 U1.60 U1.61 U1.62 U1.63 U1.64 U1.65 U1.66 U1.67 U1.77 U1.78 U1.79 U1.80 U1.81 U1.82 U1.83 U1.84 U1.85 U1.86 U1.87 U1.88 U1.90 U1.91 U1.92 U1.93 U1.95 U1.96 U1.97 U1.98 U4.2 U4.6 U4.9 U4.10 U4.12 U4.13 U4.14 U4.27 U4.28

## Polygon pours and split planes (outlines as drawn)
GND on Top Layer "GND_Top" (solid, remove dead copper, pour order 0): 1000,3996 3195,3996 3195,1000 1000,1000
GND on Bottom Layer "GND_Bottom" (solid, remove dead copper, pour order 2): 994.89,3732 1000,3996 3195,3996 3195,3878 3195,1005 3135,1005 994.89,1005

## Keep-outs
Keep-Out Layer:
  lines w10: 995,995 3200,995 3200,4000 995,4000 995,995

## Silkscreen, mask and mechanical layers (free items; w line width, h text height)
Top Overlay:
  text "CAN2" at 1037,3133 h60
  text "PWR" at 1979,2134 h39.37
  text "RST" at 3006,2095 h39.37
  text "CAN1" at 1061,1805 h60
  text "CCS V3.2.1 / Logan / Hunter" at 1573,1183 h60
  text "Rx" at 2712,1013 h39.37
  text "Tx" at 2556,1009 h39.37